# Altium PCB PCB1.PcbDoc
Units mil, origin at the board's own origin, x right, y up, seen from the top; angles counter-clockwise.
Board outline 8005 x 2000 mil, 2 copper layers (Top Layer, Bottom Layer); 32 components, 28 nets, 127 pads, 1 vias.
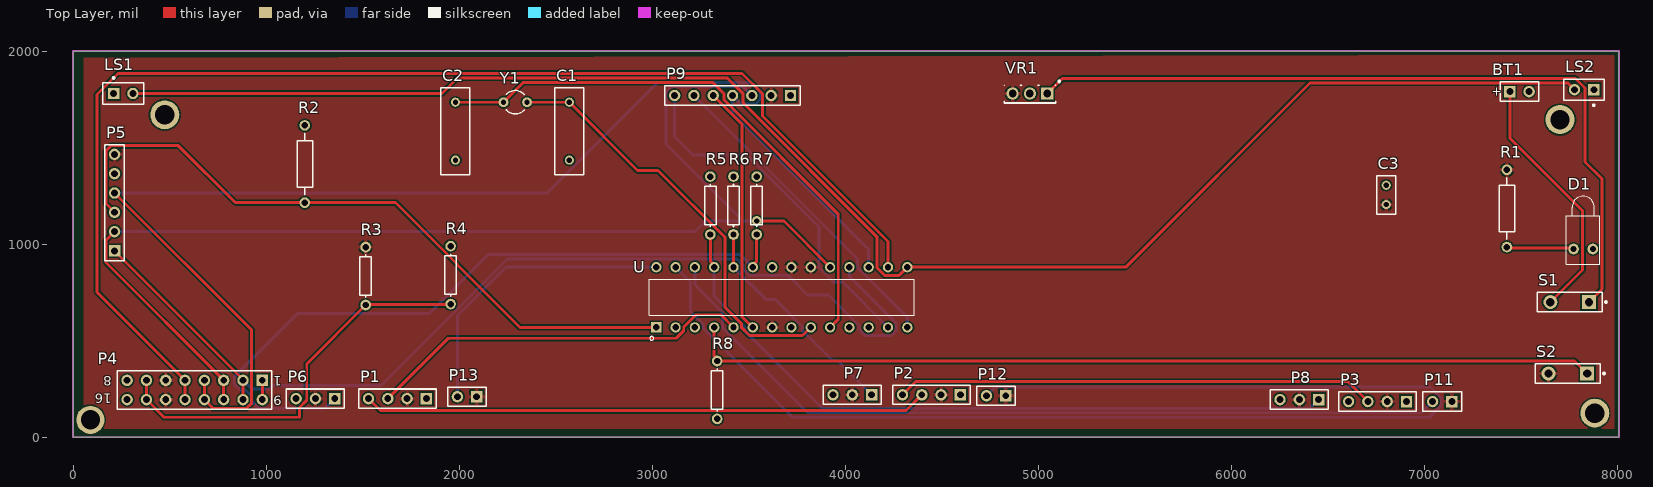
[diagram p0: Top Layer view]
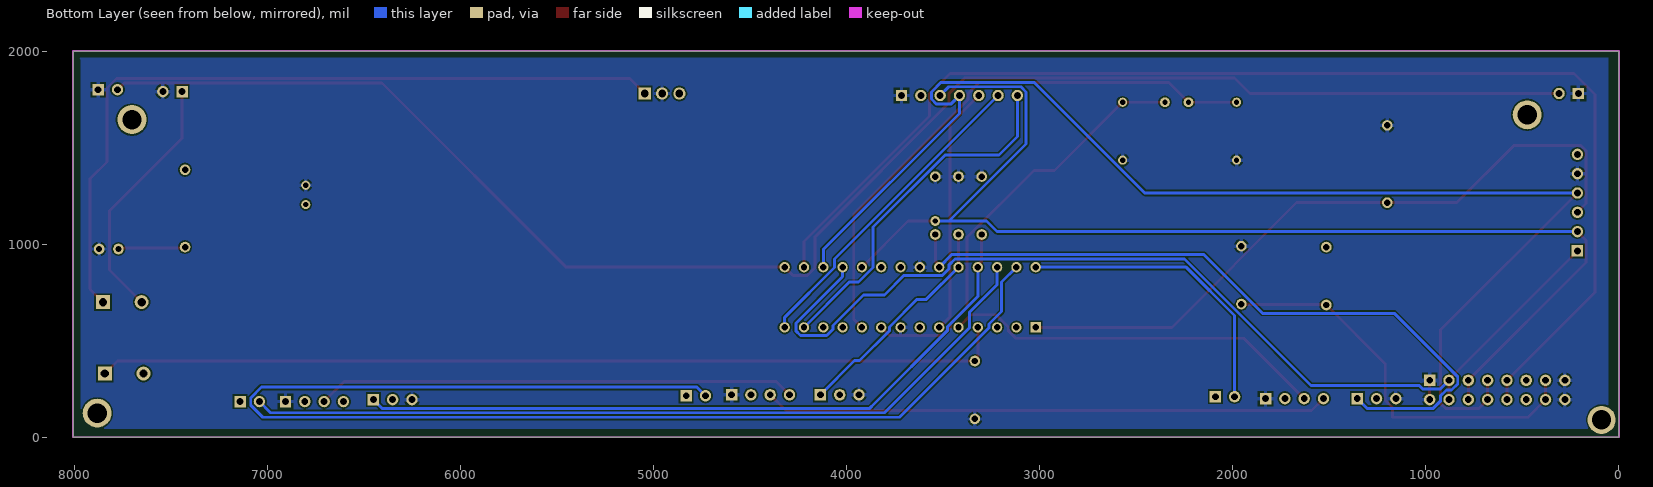
[diagram p1: Bottom Layer view, seen from below]

## Layer stack, top to bottom
Top Solder: solder mask 0.4, Solder Resist, Dk 3.5
Top Layer: signal copper 1.4
Dielectric 1: dielectric 12.6, FR-4, Dk 4.8
Bottom Layer: signal copper 1.4
Bottom Solder: solder mask 0.4, Solder Resist, Dk 3.5

## Board outline
0,0 8005,0 8005,2000 0,2000

## Design rules (kind name [scope] priority, off if disabled: settings)
BoardOutlineClearance [All] p1: gap=7.87 ignorepadtopadclearanceinfootprint=FALSE except(15.75: Arc-SplitBarrior Arc-SplitContinuation Track-SplitBarrior Track-SplitContinuation SMDPad-SplitBarrior SMDPad-SplitContinuation THPad-SplitBarrior THPad-SplitContinuation Via-SplitBarrior Via-SplitContinuation Fill-SplitBarrior Fill-SplitContinuation Poly-SplitBarrior Poly-SplitContinuation Region-SplitBarrior Region-SplitContinuation Text-SplitBarrior Text-SplitContinuation)
Clearance "Clearance Bottom Layer" [OnLayer('Bottom Layer')] p1: gap=8 ignorepadtopadclearanceinfootprint=TRUE except(10: Arc-Text Track-Text SMDPad-Text THPad-Text Via-Text Fill-Text Poly-Text Region-Text Text-Text)
Clearance "Clearance Top Layer" [OnLayer('Top Layer')] p2: gap=8 ignorepadtopadclearanceinfootprint=TRUE except(10: Arc-Text Track-Text SMDPad-Text THPad-Text Via-Text Fill-Text Poly-Text Region-Text Text-Text)
Clearance [All] p3: gap=7.87 ignorepadtopadclearanceinfootprint=FALSE except(3.5: Arc-Arc Arc-Track Arc-SMDPad Track-Track Track-SMDPad SMDPad-SMDPad; 5: Arc-Via Track-Via SMDPad-Via THPad-Via Via-Via; 10: Arc-Text Track-Text SMDPad-Text THPad-Text Via-Text Fill-Text Poly-Text Region-Text Text-Text)
HoleSize [All] p1: absolutevalues=TRUE maxlimit=248.03 minlimit=7.87 maxpercent=80.000 minpercent=20.000
MinimumAnnularRing [All] p1: minimumring=3
MinimumSolderMaskSliver [All] p1: minsoldermaskwidth=3.94
PolygonConnect PolygonConnect_1 [All] p1: thpad.connectstyle=Relief thpad.reliefconductorwidth=20 thpad.reliefentries=4 thpad.polygonreliefangle="90 Angle" thpad.airgapwidth=10 smdpad.connectstyle=Relief smdpad.reliefconductorwidth=20 smdpad.reliefentries=4 smdpad.polygonreliefangle="90 Angle" smdpad.airgapwidth=10 via.connectstyle=Direct via.reliefconductorwidth=20 via.reliefentries=4 via.polygonreliefangle="90 Angle" via.airgapwidth=10
RoutingCorners [All] p1: cornerstyle=Round minsetback=100 maxsetback=100
RoutingVias [All] p1: holewidth=19.68 width=39.37 viastyle="Through Hole" minholewidth=7.87 minwidth=17.72 maxholewidth=39.37 maxwidth=78.74
SilkToSilkClearance [All] p1: silktosilkclearance=3.94
SilkToSolderMaskClearance [IsPad] p1: minsilkscreentomaskgap=3.94 clearancetoexposedcopper=TRUE
SolderMaskExpansion [All] p1: expansion=4 istentingtop=FALSE
Width [All] p1: maxlimit=100 minlimit=3.5 preferedwidth=15
25 further rules are at their usual default settings.

## Components (designator, comment, footprint, x,y, rotation, side; value= is the part's Value field where it differs from the comment)
BT1 "Battery" BAT-2 7490,1790 r0 top
C1 "Cap" RAD-0.3 2570,1585 r90 top value=22pF
C2 "Cap" RAD-0.3 1980,1585 r90 top value=22pF
C3 "Cap Pol1" RAD-0.1 6800,1255 r90 top value=10uF
D1 "LED0" LED-1 7820,975 r90 top
LS1 "Speaker" PIN2 210,1780 r0 top
LS2 "Speaker" PIN2 7875,1800 r180 top
P1 "Ring 1" HDR1X4 1829.97,200 r180 top
P2 "Ring 2" HDR1X4 4595,220 r180 top
P3 "Ring 3" HDR1X4 6905,185 r180 top
P4 "SD Card Reader" HDR2X8_CEN 980,295 r180 top
P5 "Programmer" HDR1X6 215,965 r90 top
P6 "Header 3" HDR1X3 1355,200 r180 top
P7 "Header 3" HDR1X3 4135,220 r180 top
P8 "Header 3" HDR1X3 6450,195 r180 top
P9 "OLED" HDR1X7 3715,1770 r180 top
P11 "Header 2" HDR1X2 7140,185 r180 top
P12 "Header 2" HDR1X2 4830,215 r180 top
P13 "Header 2" HDR1X2 2090,210 r180 top
R1 "Res2" AXIAL-0.4 7425,1185 r270 top value=470
R2 "Res2" AXIAL-0.4 1200,1415 r90 top value=1K
R3 "Res1" AXIAL-0.3 1515,835 r90 top value=1K
R4 "Res1" AXIAL-0.3 1955,840 r270 top value=2K
R5 "Res1" AXIAL-0.3 3300,1200 r270 top value=1K
R6 "Res1" AXIAL-0.3 3420,1200 r270 top value=1K
R7 "Res1" AXIAL-0.3 3540,1200 r270 top value=1K
R8 "Res1" AXIAL-0.3 3335,245 r90 top value=1K
S1 "SW-SPST" SPST-2 7750,700 r180 top
S2 "SW-PB" SPST-2 7740,330 r180 top
U "ATMEGA328P-PU" DIP794W46P254L2967H457Q28B 3670,725 r90 top
VR1 "Volt Reg" 369-03 4955,1780 r180 top
Y1 "XTAL" R38 2290,1735 r90 top

## Footprints (in the part's own frame and the unit in brackets; to place one, negate y for a bottom-side part, rotate by r counter-clockwise, add the part's x,y. Pads: shape width x height; smd on the part's side, far side on the other; paste and mask are expansions set on the pad)
369-03 [mm] "TO, Thru-Hole, Vertical, Heatsink Mounted; 3 In-Line Leads; Pitch 2.28 mm"
  rect 1.6x1.6 hole 1: 1(-2.28,0)
  round 1.6 hole 1: 2(0,0) 3(2.28,0)
  silkscreen extent -3.98,-1.72 3.4,1.3, body extent -3.45,-1.15 3.45,1.35, height 9.7
AXIAL-0.3 [mm] "Axial Device, Thru-Hole; 2 Leads; 0.3 in Pin Spacing"
  round 1.4 hole 0.85: 1(-3.81,0) 2(3.81,0)
  silkscreen extent -2.77,-0.76 2.77,0.76
AXIAL-0.4 [mm] "Axial Device, Thru-Hole; 2 Leads; 0.4 in Pin Spacing"
  round 1.4 hole 0.85: 1(-5.08,0) 2(5.08,0)
  silkscreen extent -4.06,-1.02 4.06,1.02
BAT-2 [mm] "Battery; 2 Leads"
  rect 1.5x1.5 hole 0.9: 1(-1.27,0)
  round 1.5 hole 0.9: 2(1.27,0)
  silkscreen extent -2.54,-1.27 2.54,1.27
DIP794W46P254L2967H457Q28B [mm]
  rect 1.358x1.358 hole 0.85: 1(-3.96,16.51)
  round 1.358 hole 0.85: 2(-3.96,13.97) 3(-3.96,11.43) 4(-3.96,8.89) 5(-3.96,6.35) 6(-3.96,3.81) 7(-3.96,1.27) 8(-3.96,-1.27) 9(-3.96,-3.81) 10(-3.96,-6.35) 11(-3.96,-8.89) 12(-3.96,-11.43) 13(-3.96,-13.97) 14(-3.96,-16.51) 15(3.96,-16.51) 16(3.96,-13.97) 17(3.96,-11.43) 18(3.96,-8.89) 19(3.96,-6.35) 20(3.96,-3.81) 21(3.96,-1.27) 22(3.96,1.27) 23(3.96,3.81) 24(3.96,6.35) 25(3.96,8.89) 26(3.96,11.43) 27(3.96,13.97) 28(3.96,16.51)
  silkscreen extent -5.65,-17.4 2.38,17.4
HDR1X2 [mm] "Connector; Header; 2 Position"
  rect 1.5x1.5 hole 0.9: 1(0,0)
  round 1.5 hole 0.9: 2(2.54,0)
  silkscreen extent -1.27,-1.27 3.81,1.27
HDR1X3 [mm] "Connector; Header; 3 Position"
  rect 1.5x1.5 hole 0.9: 1(0,0)
  round 1.5 hole 0.9: 2(2.54,0) 3(5.08,0)
  silkscreen extent -1.27,-1.27 6.35,1.27
HDR1X4 [mm] "Connector; Header; 4 Position"
  rect 1.5x1.5 hole 0.9: 1(0,0)
  round 1.5 hole 0.9: 2(2.54,0) 3(5.08,0) 4(7.62,0)
  silkscreen extent -1.27,-1.27 8.89,1.27
HDR1X6 [mm] "Connector; Header; 6 Position"
  rect 1.5x1.5 hole 0.9: 1(0,0)
  round 1.5 hole 0.9: 2(2.54,0) 3(5.08,0) 4(7.62,0) 5(10.16,0) 6(12.7,0)
  silkscreen extent -1.27,-1.27 13.97,1.27
HDR1X7 [mm] "Connector; Header; 7 Position"
  rect 1.5x1.5 hole 0.9: 1(0,0)
  round 1.5 hole 0.9: 2(2.54,0) 3(5.08,0) 4(7.62,0) 5(10.16,0) 6(12.7,0) 7(15.24,0)
  silkscreen extent -1.27,-1.27 16.51,1.27
HDR2X8_CEN [mm] "Connector; Header; 8x2 Position"
  rect 1.5x1.5 hole 0.9: 1(0,0)
  round 1.5 hole 0.9: 2(2.54,0) 3(5.08,0) 4(7.62,0) 5(10.16,0) 6(12.7,0) 7(15.24,0) 8(17.78,0) 9(0,2.54) 10(2.54,2.54) 11(5.08,2.54) 12(7.62,2.54) 13(10.16,2.54) 14(12.7,2.54) 15(15.24,2.54) 16(17.78,2.54)
  silkscreen extent -1.27,-1.27 19.05,3.81
LED-1 [mil] "LED; 2 Leads"
  round 55 hole 31.5: 1(0,50) 2(0,-50)
  silkscreen extent -79,-87 274,87
PIN2 [mm] "Photosensitive Diode; 2 Leads"
  rect 1.5x1.5 hole 0.9: 1(0,0)
  round 1.5 hole 0.9: 2(2.54,0)
  silkscreen extent -1.4,-1.4 3.94,2.17
R38 [mm] "Crystal, Thru-Hole; 2 Leads; Body 3.1 x 8.2 mm (Dia.xH)"
  round 1.3 hole 0.7: 1(0,1.55) 2(0,-1.55)
  silkscreen extent -1.55,-1.19 1.55,1.17
RAD-0.1 [mm] "Radial Cap, Thru-Hole; 2 Leads; 0.1 in Pin Spacing"
  round 1.2 hole 0.7: 1(-1.27,0) 2(1.27,0)
  silkscreen extent -2.54,-1.27 2.54,1.27
RAD-0.3 [mm] "Radial Cap, Thru-Hole; 2 Leads; 0.3 in Pin Spacing"
  round 1.2 hole 0.7: 1(-3.81,0) 2(3.81,0)
  silkscreen extent -5.71,-1.91 5.71,1.91
SPST-2 [mm] "Switch; 2 Leads"
  rect 1.85x1.85 hole 1.1: 1(-2.54,0)
  round 1.85 hole 1.1: 2(2.54,0)
  silkscreen extent -4.89,-1.27 4.28,1.27

## Part data
BT1: "Multicell Battery", LatestRevisionDate=17-Jul-2002, LatestRevisionNote="Re-released for DXP Platform.", PackageDescription="Battery; 2 Leads", PackageReference=BAT-2, Published=24-Mar-1999, Publisher="Altium Limited"
C1 C2: "Capacitor", LatestRevisionDate=17-Jul-2002, LatestRevisionNote="Re-released for DXP Platform.", PackageDescription="Radial Cap, Thru-Hole; 2 Leads; 0.3 in Pin Spacing", PackageReference=RAD-0.3, Published=8-Jun-2000, Publisher="Altium Limited"
C3: "Polarized Capacitor (Radial)", LatestRevisionDate=17-Jul-2002, LatestRevisionNote="Re-released for DXP Platform.", PackageDescription="Polarized Capacitor (Radial); 2 Leads", PackageReference=RB7.6-15, Published=8-Jun-2000, Publisher="Altium Limited"
D1: "Typical INFRARED GaAs LED", LatestRevisionDate=08-Jul-2005, LatestRevisionNote="Mech Layer 1 removed.", PackageDescription="LED; 2 Leads", PackageReference=LED-0, Published=8-Jun-2000, Publisher="Altium Limited"
LS1 LS2: "Loudspeaker", LatestRevisionDate=17-Jul-2002, LatestRevisionNote="Re-released for DXP Platform.", PackageReference=PIN2, Published=24-Mar-1999, Publisher="Altium Limited"
P1 P2 P3: library part "Header 4", "Header, 4-Pin", LatestRevisionDate=17-Jul-2002, LatestRevisionNote="Re-released for DXP Platform.", Publisher="Altium Limited"
P4: library part "Header 8X2A", "Header, 8-Pin, Dual row", LatestRevisionDate=17-Jul-2002, LatestRevisionNote="Re-released for DXP Platform.", Publisher="Altium Limited"
P5: library part "Header 6", "Header, 6-Pin", LatestRevisionDate=17-Jul-2002, LatestRevisionNote="Re-released for DXP Platform.", Publisher="Altium Limited"
P6 P7 P8: "Header, 3-Pin", LatestRevisionDate=17-Jul-2002, LatestRevisionNote="Re-released for DXP Platform.", Publisher="Altium Limited"
P9: library part "Header 7", "Header, 7-Pin", LatestRevisionDate=17-Jul-2002, LatestRevisionNote="Re-released for DXP Platform.", Publisher="Altium Limited"
P11 P12 P13: "Header, 2-Pin", LatestRevisionDate=17-Jul-2002, LatestRevisionNote="Re-released for DXP Platform.", Publisher="Altium Limited"
R1 R2 R3 R4 R5 R6 R7 R8: "Resistor", LatestRevisionDate=17-Jul-2002, LatestRevisionNote="Re-released for DXP Platform.", Published=8-Jun-2000, Publisher="Altium Limited"
  R1 R2: PackageDescription="Axial Device, Thru-Hole; 2 Leads; 0.4 in Pin Spacing", PackageReference=AXIAL-0.4
  R3 R4 R5 R6 R7 R8: PackageDescription="Axial Device, Thru-Hole; 2 Leads; 0.3 in Pin Spacing", PackageReference=AXIAL-0.3
S1: "Single-Pole, Single-Throw Switch", LatestRevisionDate=17-Jul-2002, LatestRevisionNote="Re-released for DXP Platform.", PackageDescription="Switch; 2 Leads", PackageReference=SPST-2, Published=24-Mar-1999, Publisher="Altium Limited"
S2: "Switch", LatestRevisionDate=17-Jul-2002, LatestRevisionNote="Re-released for DXP Platform.", PackageDescription="Switch; 2 Leads", PackageReference=SPST-2, Published=24-Mar-1999, Publisher="Altium Limited"
U: "AVR AVRÂ® ATmega Microcontroller IC 8-Bit 20MHz 32KB _16K x 16_ FLASH 28-PDIP", Package="PDIP-28 Atmel", Availability=Unavailable, MF=Microchip, MP=ATMEGA328P-PU, Price=None, SnapEDA_Link=https://www.snapeda.com/parts/ATMEGA328P-PU/Microchip/view-part/44282/?ref=snap
VR1: "Voltage Regulator", LatestRevisionDate=29-May-2009, LatestRevisionNote="IPC-7351 Footprint Added.", PackageDescription="3-Pin Transistor Outline Package 2.54 mm Pitch, 15.1 mm Lead Span", PackageReference=D2PAK, Published=24-Mar-1999, Publisher="Altium Limited"
Y1: "Crystal Oscillator", LatestRevisionDate=17-Jul-2002, LatestRevisionNote="Re-released for DXP Platform.", PackageDescription="Crystal, Thru-Hole; 2 Leads; Body 3.1 x 8.2 mm (Dia.xH)", PackageReference=R38, Published=8-Jun-2000, Publisher="Altium Limited"

## Free pads (board coordinates)
  round 145.67 hole 100: 2(90,90)
  round 150 hole 100: 2(475,1670) 2(7700,1645) 2(7880,125)

## Via types
v1: diameter 50, hole 28, Top Layer to Bottom Layer, 1 vias

## Nets (pads, with @x,y where several pads share a name; then routed paths per layer and width w, separated by ;. In a path a pad name is that pad's centre, name@x,y a point inside that pad or via, vN(x,y) a via of type N, cw(c..) or ccw(c..) an arc to the next point about the centre after c; other vN are vias at no path point)
+5: C3.1 P1.2 P2.2 P3.2 P4.6 P4.14 P5.6 P6.2 P7.2 P8.2 P9.2 P11.1 P12.1 P13.1 R1.1 R3.2 S2.2 U.7 U.20 U.21 VR1.3 | length 18
  Top Layer w15: VR1.3 VR1.3@4865.24,1786.06
  Bottom Layer w15: P9.2@3603.08,1770 P9.2
GND: BT1.2 C1.1 C2.1 C3.2 D1.2 LS1.1 LS2.1 P1.1 P2.1 P3.1 P4.1 P4.8 P4.9 P4.16 P5.5 P6.3 P7.3 P8.3 P9.1 R2.2 R4.1 R5.1 R6.1 R7.1 R8.1 U.8 U.22 VR1.2 | length 131.2
  Top Layer w15: P4.9 P4.1
  Bottom Layer w15: P9.1@3692.97,1792.03 P9.1
NetBT1_1: BT1.1 S1.2 | length 1315.3
  Top Layer w15: BT1.1 7440,1550.25 7817,1173.25 7817,867 S1.2
NetC1_2: C1.2 U.9 Y1.2 | length 2210.4
  Top Layer w15: Y1.2 C1.2 2923.61,1381.39 3029.5,1381.39 3376.94,1033.95 3376.94,671.88 3462.23,586.59 3462.23,567.14 3502.51,526.86 3777.77,526.86 U.9
NetC2_2: C2.2 U.10 Y1.1 | length 2929.6
  Top Layer w15: C2.2 Y1.1 2332,1838.03 3310.65,1838.03 3369.97,1778.71 3369.97,1747.55 3962.23,1155.29 3962.23,611.33 U.10
NetD1_1: D1.1 R1.2 | length 349.1
  Top Layer w15: R1.2 7430,980 7765,980 D1.1
NetLS1_2: LS1.2 LS2.2 U.15 | length 8470.8
  Top Layer w15: LS1.2 1910.27,1780 1991.3,1861.03 3387.65,1861.03 3469.97,1778.71 3469.97,1730.93 4162.23,1038.67 4162.23,878.95 4202.51,838.67 4277.77,838.67 U.15 5450.91,880.91 6405.03,1835.03 7739.97,1835.03 LS2.2
NetP1_3: P1.3 U.5 | length 2008.3
  Top Layer w15: P1.3 1942.97,513 3123.63,513 3162.23,551.6 3162.23,571.05 3225.51,634.33 3354.77,634.33 U.5
NetP1_4: P1.4 P2.3 | length 2924.6
  Top Layer w15: P1.4 1591.91,138.06 4313.06,138.06 P2.3
NetP2_4: P2.4 P3.3 | length 2480.9
  Top Layer w15: P2.4 4363.03,288.03 6601.97,288.03 P3.3
NetP4_2: P4.2 P4.10 P5.1 U.18 | length 5352
  Top Layer w15: P5.1 880,300 P4.2 P4.10
  Bottom Layer w15: P4.2 925.03,249.97 1015.95,249.97 1034,268.03 1593.92,268.03 2249.03,923.14 3437.49,923.14 3470,890.63 3470,871.18 3502.51,838.67 3702.51,838.67 3803.81,737.37 3911.45,737.37 4070,578.82 4070,559.37 4102.51,526.86 4237.49,526.86 4262.23,551.6 4262.23,589.93 4020.49,831.67 4020.49,880.41 U.18
NetP4_3: P4.3 P4.11 P5.2 P9.3 U.19 | length 6276.7
  Top Layer w15: P5.2 169.97,1019.97 169.97,905.03 P4.3 P4.11 ; v1(3540,1120) 3680.91,1120 U.19
  Bottom Layer w15: P5.2 3220,1065 3275,1120 3469.11,1120 ; P9.3 3469.97,1815.03 3096.35,1815.03 3069.97,1788.65 3069.97,1519.13 3469.11,1120 ; v1(3540,1120) 3469.11,1120
NetP4_4: P4.4 P4.12 P5.4 P9.4 U.17 | length 6755.6
  Top Layer w15: P5.4 925.03,554.97 925.03,176.35 898.65,149.97 725.03,149.97 P4.12 P4.4
  Bottom Layer w15: P5.4 2455.33,1265 3028.35,1838.03 3510.65,1838.03 3560.03,1788.65 3560.03,1751.35 3533.65,1724.97 3460.03,1724.97 P9.4 3415,1677.2 4120,972.2 U.17 U.17@4118.34,882.57
NetP4_5: P4.5 P4.13 U.16 | length 6470.7
  Top Layer w15: P4.13 P4.5 123.97,751.03 123.97,1774.95 233.05,1884.03 3464.65,1884.03 3569.97,1778.71 3569.97,1663.46 4220,1013.43 U.16
NetP4_7: P4.7 P4.15 R3.1 R4.2 | length 2095.3
  Top Layer w15: P4.7 P4.15 471.03,103.97 1172.65,103.97 1172.65,153.97 1209.97,191.29 1209.97,379.97 R3.1 1517.5,687.5 1952.5,687.5 R4.2
NetP5_3: P5.3 R2.1 U.1 | length 3588
  Top Layer w15: P5.3 169.97,1210.03 169.97,1483.65 196.35,1510.03 545.23,1510.03 840.26,1215 R2.1 1669.11,1215 2315.01,569.09 U.1
NetP6_1: P6.1 R7.2 U.23 | length 3797.8
  Top Layer w15: U.23 3520,891.31 3540,911.31 R7.2
  Bottom Layer w15: P6.1 1304.97,149.97 961.35,149.97 925.03,186.29 925.03,213.65 893.68,245 866.32,245 834.97,276.35 834.97,313.65 1163.26,641.94 1846.05,641.94 2150.24,946.14 3454.77,946.14 U.23
NetP7_1: P7.1 R6.2 U.24 | length 1169.2
  Top Layer w15: U.24 R6.2
  Bottom Layer w15: U.24 3586.54,714.37 3634.45,714.37 3777.77,571.05 3777.77,551.6 3932.55,396.81 3958.19,396.81 P7.1
NetP8_1: P8.1 R5.2 U.25 | length 3729.3
  Top Layer w15: R5.2 3300,911.31 3320,891.31 U.25
  Bottom Layer w15: U.25 3320,728.82 3477.77,571.05 3477.77,551.6 3854.4,174.97 3879.4,149.97 6404.97,149.97 P8.1
NetP9_5: P9.5 U.6 | length 1285.8
  Top Layer w15: P9.5 3463.06,1621.94 3463.06,626.04 U.6
NetP9_6: P9.6 U.14 | length 1658.6
  Bottom Layer w15: P9.6 4062.23,922.77 4062.23,878.95 4320,621.18 U.14
NetP9_7: P9.7 U.13 | length 1849.7
  Bottom Layer w15: P9.7 3115,1557.53 3210.47,1462.06 3488.84,1462.06 3862.23,1088.66 3862.23,878.95 3937.86,803.32 3985.77,803.32 U.13
NetP10_1: 
NetP11_2: P11.2 U.26 | length 4256.8
  Bottom Layer w15: U.26 3220,789.93 3362.23,647.7 3362.23,567.14 3802.4,126.97 6981.97,126.97 P11.2
NetP12_2: P12.2 U.27 | length 6847.5
  Bottom Layer w15: U.27 3197,803.91 3197,651.82 3262.23,586.59 3262.23,567.14 3725.4,103.97 7022.65,103.97 7085.03,166.35 7085.03,203.65 7028.65,260.03 4775.03,260.03 P12.2
NetP13_2: P13.2 U.28 | length 1553.9
  Bottom Layer w15: P13.2 1990,630 2240.91,880.91 U.28
NetR8_2: R8.2 S2.1 U.4 | length 4712.2
  Top Layer w15: U.4 3320,420.86 3335,405.86 R8.2 7775,395 S2.1
NetS1_1: S1.1 VR1.1 | length 4010.5
  Top Layer w15: VR1.1 5122.79,1858.03 7780.65,1858.03 7829.97,1808.71 7829.97,1425.63 7917,1338.61 7917,767 S1.1
pads on no net: P3.4 U.2 U.3 U.11 U.12

## Polygon pours and split planes (outlines as drawn)
+5 on Top Layer "+5_L01_P003" (solid, pour order 3): 55,1965 55,45 7980,45 7980,1979.99
GND on Bottom Layer "GND_L02_P001" (solid, pour order 1): 55,1965 7975,1965 7965,1955 7965,45 65,45 55,55

## Keep-outs
Keep-Out Layer:
  the board outline again, w10

## Text inside footprints (layer, text, board x,y; h text height)
BT1: Top Overlay "+" at 7345.51,1767.28 h45.28
P4: Top Overlay "16" at 200,225 h50 r180; Top Overlay "8" at 200,315 h50 r180; Top Overlay "1" at 1080,315 h50 r180; Top Overlay "9" at 1080,215 h50 r180